# Altium PCB Arduino_DUE_V02b.PcbDoc (part 1 of 3)
Units mil, origin at the board's own origin, x right, y up, seen from the top; angles counter-clockwise.
Board outline 4416.66 x 2112 mil, 4 copper layers (Top Layer, Mid-Layer 1, Mid-Layer 2, Bottom Layer); 129 components, 175 nets, 644 pads, 366 vias.
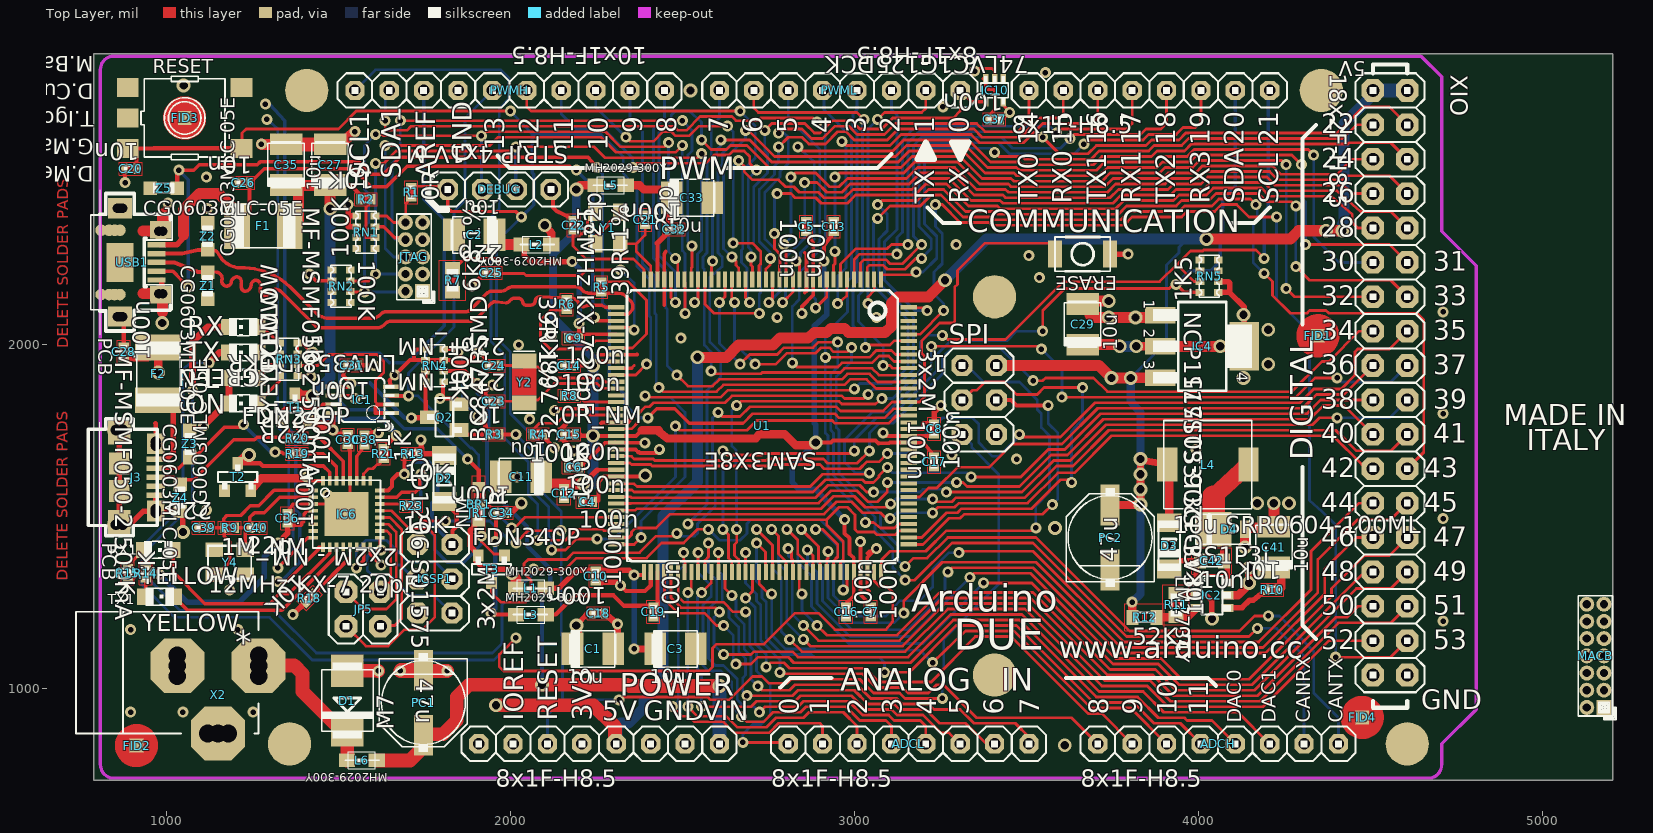
[diagram p0: Top Layer view]
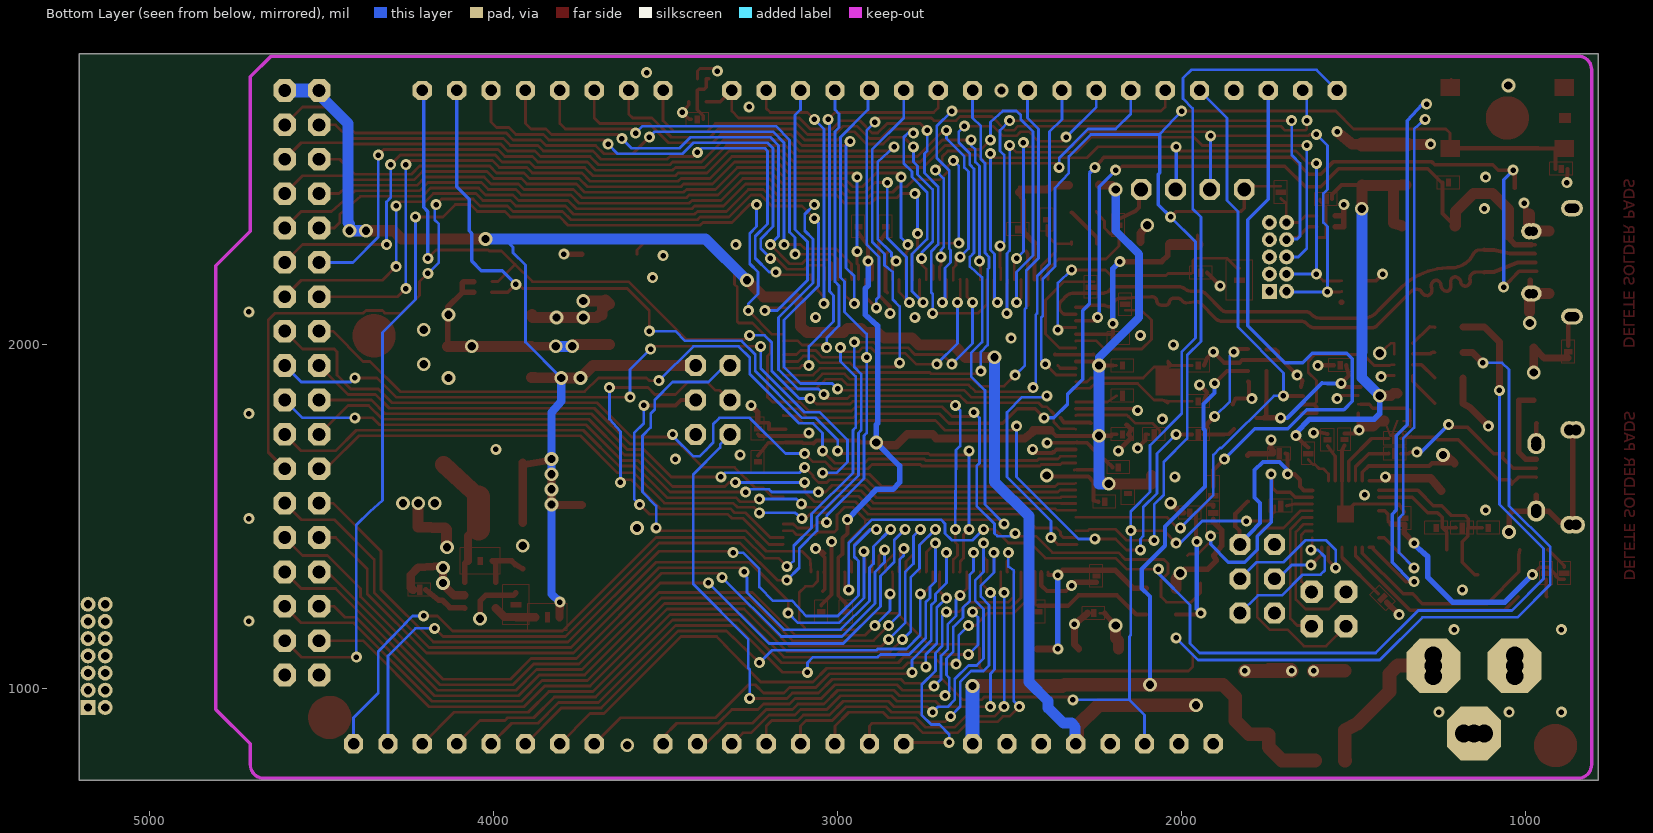
[diagram p1: Bottom Layer view, seen from below]
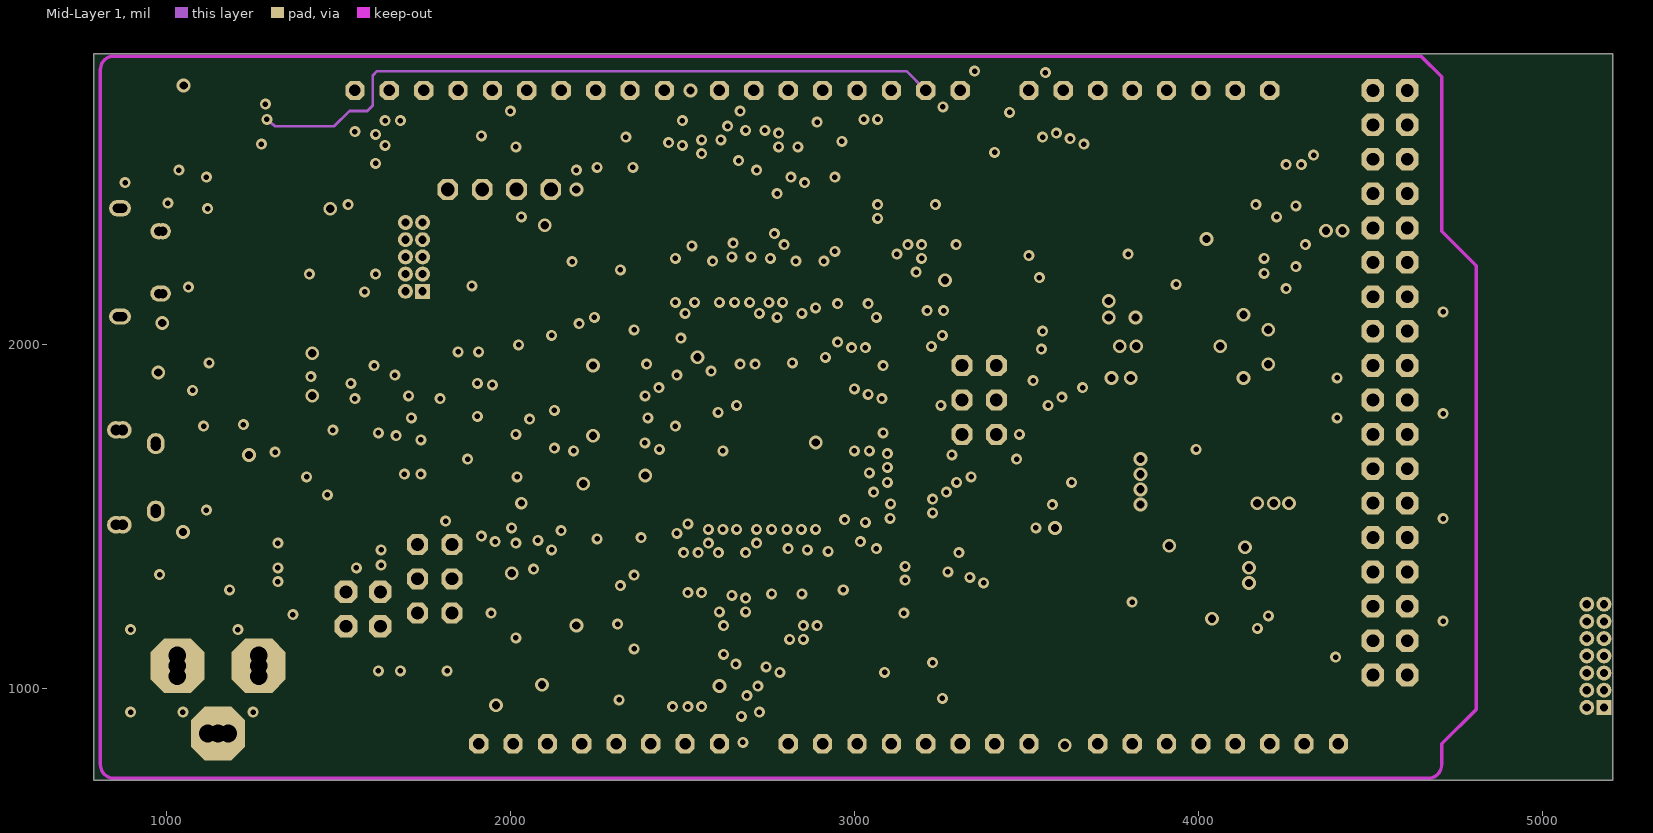
[diagram p2: Mid-Layer 1]
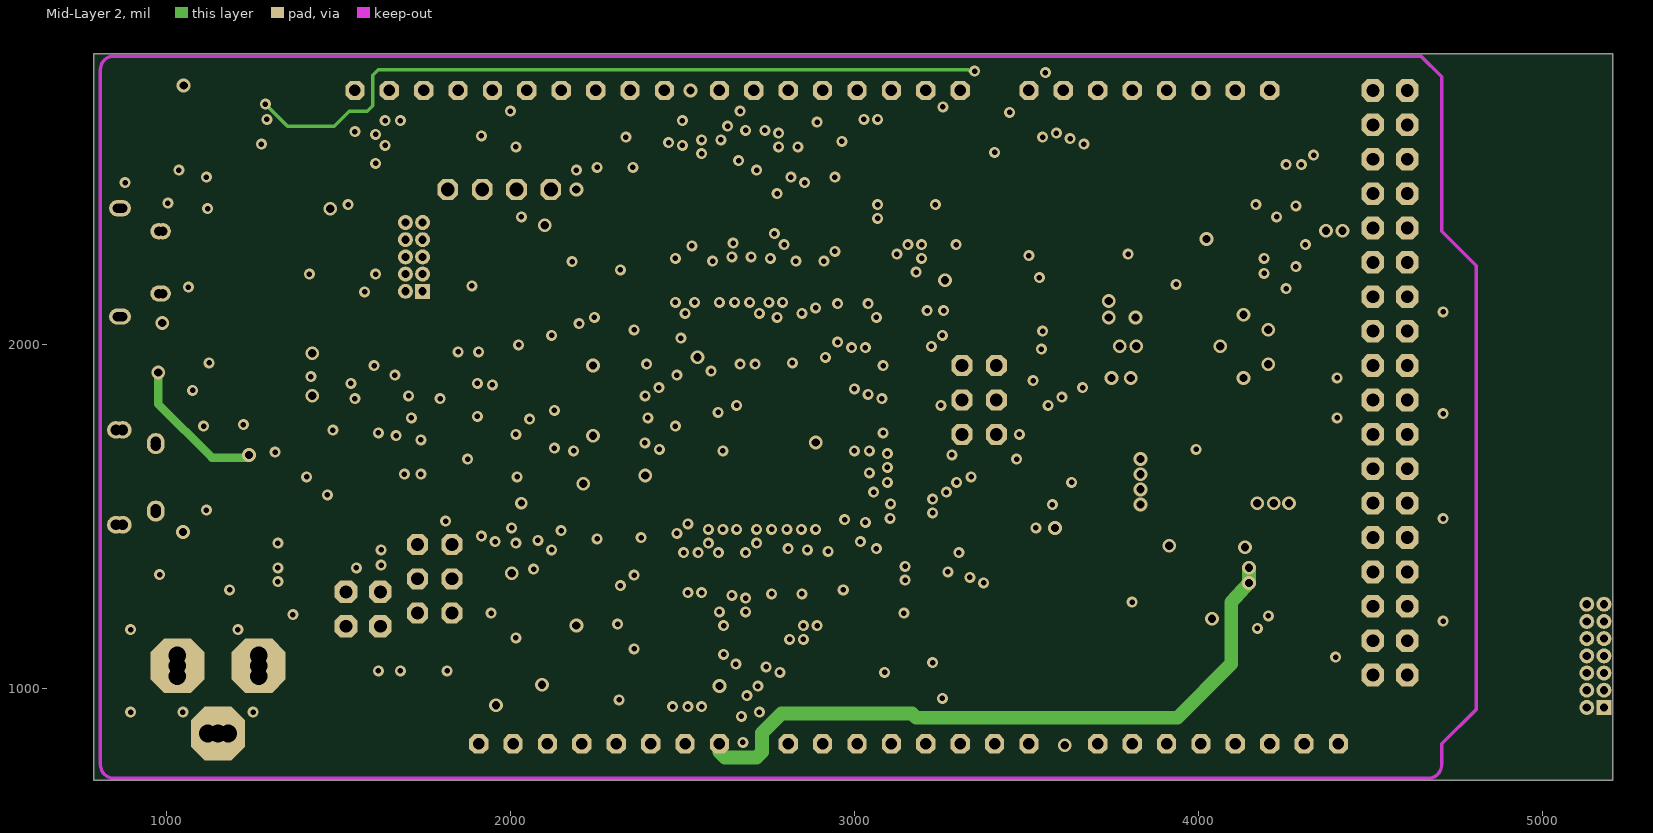
[diagram p3: Mid-Layer 2]

## Layer stack, top to bottom
Top Layer: signal copper 1.4
Dielectric: core 12.6, FR-4, Dk 4.8
Mid-Layer 1: signal copper 1.4
Dielectric: prepreg 12.6, FR-4, Dk 4.8
Mid-Layer 2: signal copper 1.4
Dielectric: core 12.6, FR-4, Dk 4.8
Bottom Layer: signal copper 1.4

## Board outline
789.13,733 5205.79,733 5205.79,2845 789.13,2845

## Design rules (kind name [scope] priority, off if disabled: settings)
AssemblyTestPointUsage [All] p1 off:
AssemblyTestpoint [All] p1 off: testpointundercomponent=TRUE minsize=40 maxsize=100 preferedsize=60 minholesize=0 maxholesize=40 preferedholesize=32 testpointgrid=1 usegrid=TRUE gridtolerance=0.01 allowsidetop=TRUE allowsidebottom=TRUE
Clearance [All] p1: gap=4
PolygonConnect [All] p1: connectstyle=Relief reliefconductorwidth=10 reliefentries=4 polygonreliefangle="90 Angle" airgapwidth=10
RoutingVias [All] p1: holewidth=28 width=50 viastyle="Through Hole" minholewidth=28 minwidth=50 maxholewidth=28 maxwidth=50
SolderMaskExpansion [All] p1: expansion=4
Width [All] p1: maxlimit=10 minlimit=10 preferedwidth=10
26 further rules are at their usual default settings.

## Components (designator, comment, footprint, x,y, rotation, side; value= is the part's Value field where it differs from the comment)
ADCH "8x1F-H8.5" 1X08 4057.98,839 r0 top
ADCL "8x1F-H8.5" 1X08 3157.98,839 r0 top
BR1 "NM" J0402 1907.98,1561 r270 top
C1 "10u" SMC_B 2239.98,1115 r0 top
C2 "10u" SMC_B 1894.98,2319 r180 top
C3 "10u" SMC_B 2479.98,1115 r0 top
C4 "100n" C0402 2223.98,1543 r0 top
C5 "100n" C0402 2859.98,2343 r270 top
C6 "100n" C0402 2183.98,1643 r0 top
C7 "100n" C0402 3047.98,1223 r90 top
C8 "100n" C0402 3231.98,1755 r270 top
C9 "100n" C0402 2183.98,2019 r0 top
C10 "100n" C0402 2247.98,1327 r90 top
C11 "10u" SMC_B 2030.98,1616 r180 top
C12 "100n" C0402 2155.98,1567 r90 top
C13 "100n" C0402 2939.98,2343 r270 top
C14 "100n" C0402 2171.98,1939 r0 top
C15 "100n" C0402 2171.98,1739 r0 top
C16 "100n" C0402 2975.98,1223 r90 top
C17 "100n" C0402 3231.98,1659 r90 top
C18 "100n" C0402 2255.98,1219 r180 top
C19 "100n" C0402 2415.98,1223 r90 top
C20 "10n" C0402 895.98,2511 r180 top
C21 "22p" C0402 2391.98,2363 r90 top
C22 "22p" C0402 2183.98,2347 r90 top
C23 "22pF_NM" C0402 1951.98,1835 r180 top
C24 "22pF_NM" C0402 1951.98,1939 r180 top
C25 "22p" C0402 1943.98,2209 r180 top
C26 "10n" C0402 1223.98,2471 r180 top
C27 "10u" SMC_B 1475.98,2523 r90 top
C28 "100n" C0402 875.98,1979 r90 top
C29 "10u" SMC_B 3663.98,2059 r90 top
C30 "100n" C0402 1526.98,1724 r90 top
C31 "100n" C0402 1538.98,1940 r180 top
C32 "100n" C0402 2475.98,2335 r180 top
C33 "10u" SMC_B 2527.98,2427 r0 top
C34 "100n" C0402 1975.98,1511 r180 top
C35 "10u" SMC_B 1347.98,2523 r90 top
C36 "100n" C0402 1351.98,1495 r90 top
C37 "100n" C0402 3407.98,2655 r180 top
C38 "1u" C0402 1575.98,1723 r90 top
C39 "22p" C0402 1107.98,1467 r180 top
C40 "22p" C0402 1259.98,1467 r0 top
C41 "10u" SMC_B 4219.98,1411 r90 top
C42 "10n" C0603-ROUND 4039.98,1371 r0 top
COMMUNICATION "8x1F-H8.5" 1X08 3857.98,2739 r0 top
D1 "M7" SMB 1525.98,965 r90 top
D2 "CD1206-S01575" MINIMELF 1807.98,1611 r270 top
D3 "CD1206-S01575" MINIMELF 3915.98,1415 r90 top
D4 "SS1P3L" DO220AAL 4071.98,1463 r0 top
DEBUG "STRIP 4x1V M" 1X04 1967.98,2451 r180 top
ERASE "" SMD_157SW 3663.98,2263 r180 top
F1 "MF-MSMF050-2 500mA" L1812 1281.98,2345 r180 top
F2 "MF-MSMF050-2 500mA" L1812 975.98,1915 r270 top
FID1 "*" FIDUCIA-MOUNT 4347.98,2025.63 r0 top
FID2 "*" FIDUCIA-MOUNT 912.98,834 r0 top
FID3 "*" FIDUCIA-MOUNT 1052.98,2659 r0 top
FID4 "*" FIDUCIA-MOUNT 4476.98,916 r0 top
IC1 "LMV358IDGKR" MSOP08 1569.98,1839 r90 top
IC2 "LM2734Y" SOT23-6 4039.98,1271 r270 top
IC4 "NCP1117ST33T3G -3V3" SOT223 4011.98,1995 r270 top
IC6 "ATMEGA16U2-MU" MLF32 1523.98,1507 r0 top
IC10 "74LVC1G125DCK" SC70-5 3407.98,2739 r180 top
ICSP1 "3x2M" 2X03 1779.98,1319 r90 top
J3 "USB-MICRO B" CON2_USB_MICRO_B_AT 862.98,1614 r270 top
JP5 "2x2M - NM" 2X02 1571.98,1231 r180 top
JR1 "0R" R0402 1907.98,1511 r90 top
JTAG "*" PINHEAD_2X05_127 1719.98,2255 r180 top
L "YELLOW" CHIP-LED0805 1222.98,1903 r90 top
L1 "MH2029-300Y" 0805 2059.98,1291 r0 top
L2 "MH2029-300Y" 0805 2075.98,2291 r180 top
L3 "MH2029-300Y" 0805 2059.98,1215 r0 top
L4 "10u SRR0604-100ML" SRR0604 4027.98,1651 r0 top
L5 "MH2029-300Y" 0805 2291.98,2463 r0 top
L6 "MH2029-300Y" 0805 1567.98,791 r180 top
MACB "Eth" PINHEAD_2X07_127 5154.98,1095 r180 top
ON "GREEN" CHIP-LED0805 1222.98,1829 r90 top
PC1 "47u" PANASONIC_D 1746.98,959 r270 top
PC2 "47u" PANASONIC_D 3743.98,1439 r90 top
POWER "8x1F-H8.5" 1X08 2257.98,839 r0 top
PWMH "10x1F-H8.5" 1X10 1997.98,2739 r180 top
PWML "8x1F-H8.5" 1X08 2957.98,2739 r180 top
Q2 "BC847BSMD" SOT23 1807.98,1789 r90 top
R1 "0R" R0402 1711.98,2443 r90 top
R2 "10K" R0402 1579.98,2423 r180 top
R3 "1K" R0402 1951.98,1739 r180 top
R4 "100K" R0402 2079.98,1739 r0 top
R5 "39R 1%" R0402 2263.98,2167 r90 top
R6 "39R 1%" R0402 2163.98,2117 r270 top
R7 "6k8 1%" R0603-ROUND 1831.98,2187 r90 top
R8 "0R_NM" R0402 2171.98,1851 r0 top
R9 "1M_NM" R0402 1183.98,1467 r0 top
R10 "10k" R0402 4215.98,1287 r180 top
R11 "10K" R0603-ROUND 3935.98,1243 r90 top
R12 "52K3" R0603-ROUND 3843.98,1207 r0 top
R13 "10K" R0402 1715.98,1683 r0 top
R14 "1K" R0402 939.98,1335 r270 top
R15 "1K" R0402 887.98,1335 r90 top
R18 "10K" R0402 1415.98,1263 r225 top
R19 "22R" R0402 1379.98,1683 r180 top
R20 "22R" R0402 1379.98,1727 r180 top
R21 "1K" R0402 1631.98,1683 r90 top
R23 "10K" R0402 1711.98,1531 r0 top
RESET "TS42" TS42 1052.98,2659 r0 top
RN1 "100K" CAT16 1579.98,2327 r90 top
RN2 "100K" CAT16 1507.98,2170 r270 top
RN3 "1k" CAY16 1354.98,1957 r270 top
RN4 "100K" CAT16 1779.98,1939 r270 top
RN5 "1K5" CAT16 4031.98,2199 r90 top
RX "YELLOW" CHIP-LED0805 1222.98,2051 r90 top
RX1 "YELLOW" CHIP-LED0805 975.98,1403 r270 top
SPI "3x2M" 2X03 3362.98,1839 r270 top
T1 "FDN340P" SOT-23 1373.98,1818 r180 top
T2 "FDN340P" SOT-23 1207.98,1615 r180 top
T3 "FDN340P" SOT-23 1943.98,1347 r0 top
TX "YELLOW" CHIP-LED0805 1222.98,1977 r90 top
TX1 "YELLOW" CHIP-LED0805 979.98,1267 r270 top
U1 "SAM3X8E" LQFP144 2732.98,1764 r180 top
USB1 "MICRO-USB-AB1" MCR-AB1-S-RA-SMT 864.98,2239 r270 top
X2 "*" POWERSUPPLY_DC-21MM 1017.98,1069 r90 top
XIO "18x2F-H8.5" 2X18 4557.98,1889 r270 top
Y1 "12MHz KX-7 20pF" CRYSTAL-3.2-2.5 2282.98,2339 r270 top
Y2 "32.768Khz" RESONATOR_EPSON_FC_145 2039.98,1891 r90 top
Y4 "12MHz KX-7 20pF" CRYSTAL-3.2-2.5 1183.98,1367 r0 top
Z1 "CG0603MLC-05E" CT/CN0603 1119.98,2171 r270 top
Z2 "CG0603MLC-05E" CT/CN0603 1119.98,2315 r90 top
Z3 "CG0603MLC-05E" CT/CN0603 1067.98,1711 r270 top
Z4 "CG0603MLC-05E" CT/CN0603 1039.98,1555 r90 top
Z5 "CG0603MLC-05E" CT/CN0603 991.98,2455 r0 top

## Footprints (in the part's own frame and the unit in brackets; to place one, negate y for a bottom-side part, rotate by r counter-clockwise, add the part's x,y. Pads: shape width x height; smd on the part's side, far side on the other; paste and mask are expansions set on the pad)
1X04 [mil]
  oct 60x60 hole 40: 1(-150,0) 2(-50,0) 3(50,0) 4(150,0)
  silkscreen extent -200,-50 200,50
1X08 [mil]
  oct 56x56 hole 33.46: 1(-350,0) 2(-250,0) 3(-150,0) 4(-50,0) 5(50,0) 6(150,0) 7(250,0) 8(350,0)
  silkscreen extent -400,-50 400,50
1X10 [mil]
  oct 56x56 hole 33.46: 1(-450,0) 2(-350,0) 3(-250,0) 4(-150,0) 5(-50,0) 6(50,0) 7(150,0) 8(250,0) 9(350,0) 10(450,0)
  silkscreen extent -500,-50 500,50
2X02 [mil]
  oct 66x66 hole 37.4: 1(-50,-50) 2(-50,50) 3(50,-50) 4(50,50)
  silkscreen extent -100,-100 100,100
2X03 [mm]
  oct 1.55x1.55 hole 0.95: 1(-2.54,-1.27) 2(-2.54,1.27) 3(0,-1.27) 4(0,1.27) 5(2.54,-1.27) 6(2.54,1.27)
  silkscreen extent -3.81,-2.54 3.81,2.54
2X18 [mil]
  oct 66x66 hole 37.4: 1(-850,-50) 2(-850,50) 3(-750,-50) 4(-750,50) 5(-650,-50) 6(-650,50) 7(-550,-50) 8(-550,50) 9(-450,-50) 10(-450,50) 11(-350,-50) 12(-350,50) 13(-250,-50) 14(-250,50) 15(-150,-50) 16(-150,50) 17(-50,-50) 18(-50,50) 19(50,-50) 20(50,50) 21(150,-50) 22(150,50) 23(250,-50) 24(250,50) 25(350,-50) 26(350,50) 27(450,-50) 28(450,50) 29(550,-50) 30(550,50) 31(650,-50) 32(650,50) 33(750,-50) 34(750,50) 35(850,-50) 36(850,50)
  silkscreen extent -900,-100 900,100
0805 [mm]
  rect 1.2x1 smd: 1(-1.1,0) 2(1.1,0)
  silkscreen extent -1.3,-0.63 1.2,0.63
C0402 [mil]
  rect 20x30 smd: 1(-17.5,0) 2(17.5,0)
  Top Layer region: -7.87,-11.81 7.87,-11.81 7.87,11.81 -7.87,11.81
  Top Layer lines w2: -32.99,-19.02 -32.99,19.02 32.99,19.02 32.99,-19.02 -32.99,-19.02
  silkscreen extent -20,-10 20,10
C0603-ROUND [mil]
  rect 35.37x43.31 smd: 1(-35,0) 2(35,0)
  Top Layer region: -7.87,-11.81 7.87,-11.81 7.87,11.81 -7.87,11.81
  Top Layer lines w2: -57.99,-38.7 -57.99,38.7 57.99,38.7 57.99,-38.7 -57.99,-38.7
  silkscreen extent -33,-18 33,19
CAT16 [mm]
  rect 0.5x0.65 smd: 1(-1.2,-0.675) 2(-0.4,-0.675) 3(0.4,-0.675) 4(1.2,-0.675) 5(1.2,0.675) 6(0.4,0.675) 7(-0.4,0.675) 8(-1.2,0.675)
  silkscreen extent -1.55,-0.75 1.55,0.75
CAY16 [mm]
  rect 0.5x0.65 smd: 1(-1.2,-0.675) 2(-0.4,-0.675) 3(0.4,-0.675) 4(1.2,-0.675) 5(1.2,0.675) 6(0.4,0.675) 7(-0.4,0.675) 8(-1.2,0.675)
  silkscreen extent -1.55,-0.75 1.55,0.75
CHIP-LED0805 [mm]
  rect 1.2x1.2 smd: A(0,-1.05) C(0,1.05)
  silkscreen extent -0.68,-1.05 0.68,1.05
CON2_USB_MICRO_B_AT [mil]
  rect 16x53 smd: P1(-52,106) P2(-26,106) P3(0,106) P4(26,106) P5(52,106)
  round 51.5 hole 31.5: P$1(-103,106) P$2(-93,106) P$3(-138,-10) P$4(-138,10) P$5(138,10) P$6(138,-10) P$7(93,106) P$8(103,106)
  rect 70x65 smd: S1(-130,0) S2(130,0)
  rect 60x50 smd: S3(-98,106) S4(98,106)
  rect 64x60 smd: S5(-40,0) S6(40,0)
  silkscreen extent -170,-90 290,110
CRYSTAL-3.2-2.5 [mm]
  rect 1.3x1.05 smd: 1(-1.15,-0.925) 2(1.15,-0.925) 3(1.15,0.925) 4(-1.15,0.925)
  silkscreen extent -1.6,-1.25 1.6,1.25
CT/CN0603 [mm]
  rect 1x1 smd: 1(-1,0) 2(1,0)
  silkscreen extent -0.75,-0.35 0.75,0.35
DO220AAL [mil]
  rect 105x100 smd: P$1(-27.56,0)
  rect 30x50 smd: P$2(64.96,0)
  silkscreen extent -79,-43 79,43
FIDUCIA-MOUNT [mil]
  rect 40x40 smd: P$1(0,0)
  Top Layer circle w5: c0,0 r59.06
  Top Layer circle w86: c0,0 r19.68
J0402 [mm]
  rect 0.7x0.9 smd: 1(-0.65,0) 2(0.65,0) 3(1.95,0)
  Top Layer region: 1.1,-0.4 1.5,-0.4 1.5,0.4 1.1,0.4
  Top Layer region: -0.2,-0.4 0.2,-0.4 0.2,0.4 -0.2,0.4
  Top Layer lines w0.051: 2.773,-0.483 -1.473,-0.483 -1.473,0.483 2.773,0.483 2.773,-0.483
  silkscreen extent 0.72,-0.3 1.83,0.29
L1812 [mm]
  rect 1.9x3.4 smd: 1(-1.95,0) 2(1.95,0)
  silkscreen extent -2.39,-1.65 2.4,1.65
LQFP144 [mm]
  rect 0.3x1.2 smd: 1(-8.75,-10.8) 2(-8.25,-10.8) 3(-7.75,-10.8) 4(-7.25,-10.8) 5(-6.75,-10.8) 6(-6.25,-10.8) 7(-5.75,-10.8) 8(-5.25,-10.8) 9(-4.75,-10.8) 10(-4.25,-10.8) 11(-3.75,-10.8) 12(-3.25,-10.8) 13(-2.75,-10.8) 14(-2.25,-10.8) 15(-1.75,-10.8) 16(-1.25,-10.8) 17(-0.75,-10.8) 18(-0.25,-10.8) 19(0.25,-10.8) 20(0.75,-10.8) 21(1.25,-10.8) 22(1.75,-10.8) 23(2.25,-10.8) 24(2.75,-10.8) 25(3.25,-10.8) 26(3.75,-10.8) 27(4.25,-10.8) 28(4.75,-10.8) 29(5.25,-10.8) 30(5.75,-10.8) 31(6.25,-10.8) 32(6.75,-10.8) 33(7.25,-10.8) 34(7.75,-10.8) 35(8.25,-10.8) 36(8.75,-10.8) 73(8.75,10.8) 74(8.25,10.8) 75(7.75,10.8) 76(7.25,10.8) 77(6.75,10.8) 78(6.25,10.8) 79(5.75,10.8) 80(5.25,10.8) 81(4.75,10.8) 82(4.25,10.8) 83(3.75,10.8) 84(3.25,10.8) 85(2.75,10.8) 86(2.25,10.8) 87(1.75,10.8) 88(1.25,10.8) 89(0.75,10.8) 90(0.25,10.8) 91(-0.25,10.8) 92(-0.75,10.8) 93(-1.25,10.8) 94(-1.75,10.8) 95(-2.25,10.8) 96(-2.75,10.8) 97(-3.25,10.8) 98(-3.75,10.8) 99(-4.25,10.8) 100(-4.75,10.8) 101(-5.25,10.8) 102(-5.75,10.8) 103(-6.25,10.8) 104(-6.75,10.8) 105(-7.25,10.8) 106(-7.75,10.8) 107(-8.25,10.8) 108(-8.75,10.8)
  rect 1.2x0.3 smd: 37(10.8,-8.75) 38(10.8,-8.25) 39(10.8,-7.75) 40(10.8,-7.25) 41(10.8,-6.75) 42(10.8,-6.25) 43(10.8,-5.75) 44(10.8,-5.25) 45(10.8,-4.75) 46(10.8,-4.25) 47(10.8,-3.75) 48(10.8,-3.25) 49(10.8,-2.75) 50(10.8,-2.25) 51(10.8,-1.75) 52(10.8,-1.25) 53(10.8,-0.75) 54(10.8,-0.25) 55(10.8,0.25) 56(10.8,0.75) 57(10.8,1.25) 58(10.8,1.75) 59(10.8,2.25) 60(10.8,2.75) 61(10.8,3.25) 62(10.8,3.75) 63(10.8,4.25) 64(10.8,4.75) 65(10.8,5.25) 66(10.8,5.75) 67(10.8,6.25) 68(10.8,6.75) 69(10.8,7.25) 70(10.8,7.75) 71(10.8,8.25) 72(10.8,8.75) 109(-10.8,8.75) 110(-10.8,8.25) 111(-10.8,7.75) 112(-10.8,7.25) 113(-10.8,6.75) 114(-10.8,6.25) 115(-10.8,5.75) 116(-10.8,5.25) 117(-10.8,4.75) 118(-10.8,4.25) 119(-10.8,3.75) 120(-10.8,3.25) 121(-10.8,2.75) 122(-10.8,2.25) 123(-10.8,1.75) 124(-10.8,1.25) 125(-10.8,0.75) 126(-10.8,0.25) 127(-10.8,-0.25) 128(-10.8,-0.75) 129(-10.8,-1.25) 130(-10.8,-1.75) 131(-10.8,-2.25) 132(-10.8,-2.75) 133(-10.8,-3.25) 134(-10.8,-3.75) 135(-10.8,-4.25) 136(-10.8,-4.75) 137(-10.8,-5.25) 138(-10.8,-5.75) 139(-10.8,-6.25) 140(-10.8,-6.75) 141(-10.8,-7.25) 142(-10.8,-7.75) 143(-10.8,-8.25) 144(-10.8,-8.75)
  silkscreen extent -10,-10 10,10
MCR-AB1-S-RA-SMT [mm]
  rect 0.4x1.35 smd: 1(-1.3,2.7) 2(-0.65,2.7) 3(0,2.7) 4(0.65,2.7) 5(1.3,2.7)
  round 1.208 hole 0.7: P$1(-4,0.2) P$3(-4,0) P$4(-4,-0.2) P$5(4,0.2) P$6(4,0) P$7(4,-0.2) P$8(-2.3,3.15) P$9(-2.3,2.85) P$10(2.3,3.15) P$11(2.3,2.85)
  rect 2.9x2 smd: P$2(0,0)
  rect 1.3x1.6 smd: S1(-2.4,3) S2(2.4,3)
  rect 1.5x1.8 smd: S3(-4,0) S4(4,0)
  round 0.85 smd: ""(-2.375,-0.8) ""(-2.375,-0.4) ""(-2.375,0) ""(-2.375,-1.4) ""(2.375,-0.8) ""(2.375,-0.4) ""(2.375,0) ""(2.375,-1.4)
  Top Layer lines w0.075: -3.8,-0.525 -3.8,0.525
  silkscreen extent -5.35,-2.15 5.35,3.85
MINIMELF [mm]
  rect 1.4x1.8 smd: A(1.7,0) C(-1.7,0)
  silkscreen extent -1.85,-0.86 1.85,0.86
MLF32 [mm]
  rect 0.7x0.28 smd: 1(-2.45,1.75) 2(-2.45,1.25) 3(-2.45,0.75) 4(-2.45,0.25) 5(-2.45,-0.25) 6(-2.45,-0.75) 7(-2.45,-1.25) 8(-2.45,-1.75) 17(2.45,-1.75) 18(2.45,-1.25) 19(2.45,-0.75) 20(2.45,-0.25) 21(2.45,0.25) 22(2.45,0.75) 23(2.45,1.25) 24(2.45,1.75)
  rect 0.28x0.7 smd: 9(-1.75,-2.45) 10(-1.25,-2.45) 11(-0.75,-2.45) 12(-0.25,-2.45) 13(0.25,-2.45) 14(0.75,-2.45) 15(1.25,-2.45) 16(1.75,-2.45) 25(1.75,2.45) 26(1.25,2.45) 27(0.75,2.45) 28(0.25,2.45) 29(-0.25,2.45) 30(-0.75,2.45) 31(-1.25,2.45) 32(-1.75,2.45)
  rect 3.254x3.254 smd: 33(0,0)
  Top Layer region: -0.635,-0.635 0.635,-0.635 0.635,0.635 -0.635,0.635
  silkscreen extent -2.5,-2.5 2.5,2.5
MSOP08 [mm]
  rect 0.3x1.2 smd: 1(-0.976,-2.113) 2(-0.326,-2.113) 3(0.324,-2.113) 4(0.974,-2.113) 5(0.974,2.112) 6(0.324,2.112) 7(-0.326,2.112) 8(-0.976,2.112)
  silkscreen extent -1.63,-2.36 1.62,2.36
PANASONIC_D [mm]
  rect 3x1.4 smd: +(2.4,0) -(-2.4,0)
  silkscreen extent -3.65,-3.25 3.65,3.25
PINHEAD_2X05_127 [mm]
  rect 1.108x1.108 hole 0.6: 1(-0.635,2.54)
  round 1.108 hole 0.6: 2(0.635,2.54) 3(-0.635,1.27) 4(0.635,1.27) 5(-0.635,0) 6(0.635,0) 7(-0.635,-1.27) 8(0.635,-1.27) 9(-0.635,-2.54) 10(0.635,-2.54)
  silkscreen extent -1.52,-3.17 1.27,3.43
PINHEAD_2X07_127 [mm]
  rect 1.108x1.108 hole 0.6: 1(-0.635,3.81)
  round 1.108 hole 0.6: 2(0.635,3.81) 3(-0.635,2.54) 4(0.635,2.54) 5(-0.635,1.27) 6(0.635,1.27) 7(-0.635,0) 8(0.635,0) 9(-0.635,-1.27) 10(0.635,-1.27) 11(-0.635,-2.54) 12(0.635,-2.54) 13(-0.635,-3.81) 14(0.635,-3.81)
  silkscreen extent -1.52,-4.44 1.27,4.7
POWERSUPPLY_DC-21MM [mm]
  oct 4x4 hole 1.3: 1(-5.08,-3.353) 2(-0.076,-6.35) 3(-0.076,-0.356)
  round 1.95 hole 1.3: 4(-5.08,-4.115) 5(-5.08,-2.591) 6(-0.838,-0.356) 7(0.686,-0.356) 8(-0.838,-6.35) 9(0.686,-6.35)
  silkscreen extent -5.08,-6.35 3.91,7.14
R0402 [mil]
  rect 20x30 smd: 1(-17.5,0) 2(17.5,0)
  Top Layer region: -7.87,-15.75 7.87,-15.75 7.87,15.75 -7.87,15.75
  Top Layer lines w2: -32.99,19.02 -32.99,-19.02 32.99,-19.02 32.99,19.02 -32.99,19.02
  silkscreen extent -20,-10 20,10
R0603-ROUND [mil]
  rect 35.37x43.31 smd: 1(-35,0) 2(35,0)
  Top Layer region: -7.87,-15.75 7.87,-15.75 7.87,15.75 -7.87,15.75
  Top Layer lines w2: -57.99,38.7 -57.99,-38.7 57.99,-38.7 57.99,38.7 -57.99,38.7
  silkscreen extent -33,-17 33,17
RESONATOR_EPSON_FC_145 [mm]
  rect 1.1x1.8 smd: P$1(-1.55,0) P$2(1.55,0)
  Top Layer region: -1,-0.9 1,-0.9 1,0.9 -1,0.9
  Top Layer region: -1,-0.9 1,-0.9 1,0.9 -1,0.9
  Top Layer region: -1,-0.9 1,-0.9 1,0.9 -1,0.9
  silkscreen extent -2.29,-0.76 2.29,0.76
SC70-5 [mm]
  rect 0.4x0.7 smd: 1(-0.65,-0.85) 2(0,-0.85) 3(0.65,-0.85) 4(0.65,0.85) 5(-0.65,0.85)
  silkscreen extent -1,-1.05 1,1.05
SMB [mm]
  rect 2.4x2.4 smd: A(2.2,0) C(-2.2,0)
  silkscreen extent -2.79,-1.91 2.79,1.91
SMC_B [mm]
  rect 1.6x2.4 smd: +(-1.5,0) -(1.5,0)
  silkscreen extent -1.75,-1.35 1.75,1.35
SMD_157SW [mil]
  rect 40x78 smd: 1(-80,0) 2(80,0)
  silkscreen extent -80,-50 80,50
SOT23 [mm]
  rect 1x1.4 smd: 1(-0.95,-1.1) 2(0.95,-1.1) 3(0,1.1)
  silkscreen extent -1.42,-1.3 1.42,1.3
SOT23-6 [mm]
  rect 0.6x0.9 smd: 1(-0.95,-1.15) 2(0,-1.15) 3(0.95,-1.15) 4(0.95,1.15) 5(0,1.15) 6(-0.95,1.15)
  silkscreen extent -1.42,-1.4 1.42,1.4
SOT223 [mil]
  rect 48x88 smd: 1(-91,-122) 2(0,-122) 3(91,-122)
  rect 141.73x86.61 smd: 4(0,122.01)
  silkscreen extent -129,-144 129,144
SOT-23 [mil]
  rect 31x35 smd: 1(1,-40) 2(-37,40) 3(39,40)
  silkscreen extent -56,-37 58,37
SRR0604 [mm]
  rect 1.5x2.5 smd: P$1(3,0) P$2(-3,0)
  silkscreen extent -3.25,-3.25 3.25,3.25
TS42 [mm]
  rect 1.6x1.4 smd: 1(-4.2,2.25) 2(4.2,2.25) 3(-4.2,-2.25) 4(4.2,-2.25) 5(-4.2,0)
  Top Layer region: 3.48,1.626 4.928,1.626 4.928,2.87 3.48,2.87
  Top Layer region: 3.48,-2.87 4.928,-2.87 4.928,-1.626 3.48,-1.626
  Top Layer region: -4.928,-2.87 -3.48,-2.87 -3.48,-1.626 -4.928,-1.626
  Top Layer region: -4.928,1.626 -3.48,1.626 -3.48,2.87 -4.928,2.87
  Top Layer region: -4.699,-0.381 -3.81,-0.381 -3.81,0.381 -4.699,0.381
  silkscreen extent -3.23,-3.09 2.98,3.09

## Part data
ADCH ADCL COMMUNICATION POWER PWML: library part PINHD-1X8
BR1: library part J0402
C1 C2 C3 C11 C27 C29 C33 C35 C41: library part CPOL-EUSMCB
C4 C5 C6 C7 C8 C9 C10 C12 C13 C14 C15 C16 C17 C18 C19 C20 C21 C22 C23 C24 C25 C26 C28 C30 C31 C32 C34 C36 C37 C38 C39 C40: library part C-EUC0402
C42: library part C-EUC0603
D1: library part DIODE-SMB
D2 D3: library part DIODE-MINIMELF
DEBUG: library part PINHD-1X4
ERASE: library part MYSMD_PB157
F1 F2: library part L-EUL1812
FID1 FID2 FID3 FID4: library part FIDUCIALMOUNT
IC1: library part LMV358MMX
IC2: library part LM2736Y
IC4: library part MC33269ST-3.3T3
ICSP1 SPI: library part PINHD-2X3
J3: library part MYCON2_USB-MINI-B
JP5: library part PINHD-2X2
JR1 R1 R2 R3 R4 R5 R6 R8 R9 R10 R13 R14 R15 R18 R19 R20 R21 R23: library part R-EU_R0402
JTAG: library part PINHEAD_PINHD-2X5PASSO127
L ON RX RX1 TX TX1: library part LEDCHIP-LED0805
L1 L2 L3 L5 L6: library part WE-CBF_0805
L4: library part L-USSRR0604
MACB: library part PINHEAD_PINHD-2X7PASSO127
PC1 PC2: library part CPOL-EUD
PWMH: library part PINHD-1X10
R7: library part R-EU_R0603
R11 R12: library part R-EU_0603-RND
RN1 RN2 RN4 RN5: library part 4R-NCAT16
RN3: library part 4R-NCAY16
T1 T2 T3: library part PMOSSOT23
U1: library part ATSAM3X/AAU
USB1: library part MICRO_USB
X2: library part POWERSUPPLY_DC21MMX
XIO: library part PINHD-2X18
Y1 Y4: library part CRYSTAL-3.2-2.5
Y2: library part RESONATOR_EPSON_FC_145
Z1 Z2 Z3 Z4 Z5: library part VARISTORCN0603

## Free pads (board coordinates)
  round 125.98 smd: ""(1357.98,839) ""(1407.98,2739) ""(3407.98,1039) ""(3407.98,2139) ""(4357.98,2739) ""(4607.98,839)

## Via types
v1: diameter 32, hole 16, Top Layer to Bottom Layer, 313 vias
v2: diameter 40, hole 24, Top Layer to Bottom Layer, 52 vias
v3: diameter 36, hole 20, Top Layer to Bottom Layer, 1 vias

## Nets (pads, with @x,y where several pads share a name; then routed paths per layer and width w, separated by ;. In a path a pad name is that pad's centre, name@x,y a point inside that pad or via, vN(x,y) a via of type N, cw(c..) or ccw(c..) an arc to the next point about the centre after c; other vN are vias at no path point)
8PB4: IC6.18 JP5.1 | length 214.4
  Top Layer w8: IC6.18@1620.44,1457.79 1641.19,1457.79 1651.98,1447 1651.98,1311 JP5.1@1621.98,1281
8PB5: IC6.19 JP5.3 | length 431.2
  Top Layer w8: JP5.3@1521.98,1281 1571.98,1231 1639.98,1231 1667.98,1259 1667.98,1455 1645.51,1477.47 IC6.19@1620.44,1477.47
8PB6: IC6.20 JP5.2 | length 408.8
  Top Layer w8: IC6.20@1620.44,1497.16 1649.82,1497.16 1683.98,1463 1683.98,1203 1663.98,1183 1623.98,1183 JP5.2@1621.98,1181
8PB7: IC6.21 JP5.4 | length 745.3
  Top Layer w8: JP5.4@1521.98,1181 1579.98,1123 1643.98,1123 1691.98,1171 1743.98,1171 1779.98,1207 1779.98,1447 1759.98,1467 1703.98,1467 1654.14,1516.84 IC6.21@1620.44,1516.84
16U2-TX: IC6.9 IC10.2 | length 3938
  Top Layer w8: v1(3349.98,2795) 3357.98,2803 3399.98,2803 3407.98,2795 IC10.2@3407.98,2772.46
  Top Layer w10: v1(1323.98,1311) 1347.98,1311 1443.52,1406.54 1443.52,1410.54 IC6.9@1455.08,1410.54
  Mid-Layer 2 w10: v1(1287.98,2699) 1351.98,2635 1487.98,2635 1531.98,2679 1583.98,2679 1599.98,2695 1599.98,2783 1615.98,2799 3331.98,2799 3335.98,2795 v1(3349.98,2795)
  Bottom Layer w10: v1(1287.98,2699) 1299.98,2699 1343.98,2651 1343.98,1767 1375.98,1735 1375.98,1519 1387.98,1507 1387.98,1367 1331.98,1311 v1(1323.98,1311)
+3V3: BR1.3 C1.+ C4.2 C5.2 C6.2 C7.2 C8.2 C18.2 C20.2 C29.+ C37.1 ERASE.1 IC1.6 IC4.2 IC4.4 IC10.5 JR1.1 JTAG.1 L1.1 L2.1 POWER.2 POWER.4 R4.2 RN1.5 RN1.6 RN2.2 RN2.3 RN3.5 RN3.7 RN3.8 RN5.1 RN5.2 T3.2 U1.11 U1.52 U1.57 U1.62 U1.105 U1.125 | length 3123.1
  Top Layer w0.31: RN5.2@4058.55,2183.25 RN5.2@4058.81,2183
  Top Layer w8: RN3.5@1381.55,1909.76 1418.74,1909.76 v1(1419.98,1907) ; RN3.7@1381.55,1972.75 RN3.8@1381.55,2004.24 1390.74,2004.24 v2(1423.98,1975) ; RN2.2@1480.66,2185 RN2.2@1481.41,2185.75 ; IC1.6@1486.83,1851.76 1539.22,1851.76 v1(1547.98,1843) ; R4.2@2095.98,1738.5 R4.2@2097.48,1739 ; R4.2@2104.98,1739 2099.98,1740 R4.2@2095.98,1739 ; L2.1@2119.29,2291 2121.29,2292.31 L2.1@2119.98,2299 ; C1.+@2180.92,1115 C1.+@2183.98,1115 ; 2223.98,1219 C18.2@2238.48,1219 ; U1.57@2303.98,1715 U1.57@2307.78,1714.79 U1.57@2311.48,1714.5 ; U1.62@2304.48,1616.5 2306.15,1616 U1.62@2307.78,1616.36 ; v2@2389.34,1616.36 v2(2391.98,1619) ; U1.11@2880.48,2191 U1.11@2880.62,2189.2 ; C8.2@3231.98,1737.5 C8.2@3231.98,1739 ; R4.2@2095.98,1739 cw(c2096.73,1737.7) R4.2@2097.48,1739 ; R4.2@2095.98,1739 R4.2@2097.48,1739
  Top Layer w10: v1(1415.98,2205) 1435.98,2185 RN2.2@1479.98,2185 ; RN2.2@1480.66,2185 RN2.2@1479.98,2185 ; RN2.3@1481.41,2154.25 1478.73,2154.25 1479.98,2161 RN2.2@1479.98,2185 ; C37.1@3425.48,2655 3431.98,2655 v1(3451.98,2675) 3433.57,2696.59 IC10.5@3433.57,2705.54
  Top Layer w11: v1(2127.98,1809) 2130.98,1809 2135.19,1813.21 U1.52@2307.78,1813.21 ; 2251.98,1691 2275.48,1714.5 U1.57@2303.98,1715 ; 2271.48,1616.5 U1.62@2304.48,1616.5 ; U1.62@2307.78,1616.36 v2@2389.34,1616.36 ; U1.57@2311.48,1714.5 v1(2391.48,1714.5) ; v1(2847.98,2091) 2847.98,2111 2880.48,2143.5 2880.48,2188 2880.62,2187.64 U1.11@2880.62,2189.2 ; U1.11@2880.48,2191 2880.48,2294 ; v1(3017.98,1427) 3018.41,1417.43 U1.105@3018.41,1338.8 3018.41,1272.57 3047.98,1243 C7.2@3047.98,1240.5 ; v1(3083.98,1743) 3092.51,1734.47 U1.125@3158.18,1734.47 3228.51,1734.47 C8.2@3231.98,1739
  Top Layer w12: C20.2@878.48,2511 v1(879.98,2471) ; BR1.3@1907.98,1484.23 JR1.1@1907.98,1493.5 ; R4.2@2104.98,1739 2104.98,1722 v1(2127.98,1699) ; C6.2@2201.48,1643 2201.48,1644.5 2251.98,1691 ; C4.2@2241.48,1543 2255.98,1547 2255.98,1601 2271.48,1616.5 ; C5.2@2859.98,2325.5 2880.48,2294
  Top Layer w16: v1(1527.98,2407) 1527.98,2375 ; RN1.6@1553.41,2342.75 1527.98,2342.75 1527.98,2375 ; RN1.5@1553.41,2374.24 1529.41,2375 1527.98,2375 ; BR1.3@1907.98,1484.23 1883.98,1460.23 1883.98,1415 1898.98,1396 T3.2@1906.98,1387 1898.98,1372 1923.98,1347 1991.98,1347 v2(2003.98,1335) ; L1.1@2014.26,1293.41 L1.1@2016.67,1291 ; v2(2191.98,1183) 2223.98,1219 ; ERASE.1@3743.98,2263 v1(3795.98,2263) ; RN5.1@4058.55,2151.76 4084.74,2151.76 ; RN5.2@4058.55,2183 RN5.2@4058.55,2183.25 ; RN5.2@4058.81,2183 4087.98,2183 4091.98,2179 4091.98,2159 4084.74,2151.76 ; IC4.4@4133.99,1995 4133.99,2108.99 4091.22,2151.76 4084.74,2151.76
  Top Layer w24: v2(2099.98,2347) 2119.98,2323 L2.1@2119.98,2299 ; v2(3819.98,1995) IC4.2@3889.98,1995
  Top Layer w32: v2(2003.98,1335) 2015.98,1319 2015.98,1291 L1.1@2016.67,1291 ; C1.+@2183.98,1115 2183.98,1139 2191.98,1147 v2(2191.98,1183) ; C29.+@3663.98,1999.94 3767.04,1999.94 v2(3771.98,1995) ; IC4.2@3889.98,1995 IC4.4@4133.99,1995
  Bottom Layer w32: v2(3771.98,1995) v2(3819.98,1995)
  other v2: 4131.98,1903 4203.98,1943 4063.98,1995 4203.98,2043 4131.98,2087
+5V: C30.2 C36.1 D2.C D3.A IC1.8 IC4.3 IC6.4 IC6.32 ICSP1.2 L4.P$2 PC2.+ POWER.5 R12.1 R13.2 R14.1 R15.1 SPI.2 T1.2 T2.2 XIO.1 XIO.2 | length 7847
  Top Layer w10: R15.1@887.98,1317.5 902.48,1317.5 911.98,1327 911.98,1331 933.48,1352.5 R14.1@939.98,1352.5 958.48,1352.5 v1(979.98,1331) ; 1390.39,1477.41 1399.98,1487 1399.98,1507 1409.82,1516.84 IC6.4@1427.52,1516.84 ; v1(1407.98,1615) 1407.52,1603.46 IC6.32@1455.08,1603.46 ; v1(1483.98,1751) 1486.83,1753.85 IC1.8@1486.83,1800.57
  Top Layer w12: v1(1483.98,1751) 1493.48,1741.5 C30.2@1526.98,1741.5
  Top Layer w16: v1(1323.98,1423) 1352.39,1451.41 C36.1@1351.98,1477.5 1390.39,1477.41 ; v1@1403.98,1611 v1(1407.98,1615) ; v1(1739.98,1723) 1741.57,1721.41 1741.57,1698.59 1733.98,1691 R13.2@1733.48,1683 D2.C@1802.91,1683 ; D2.C@1803.98,1683 D2.C@1802.91,1683 ; D2.C@1807.98,1677.93 D2.C@1802.91,1683
  Top Layer w20: v2(3831.98,1623) 3831.98,1655 3839.98,1663 L4.P$2@3909.87,1651
  Top Layer w24: T2.2@1244.98,1575 1275.98,1611 v1@1403.98,1611 ; PC2.+@3743.98,1533.49 3830.47,1533.49 v2(3831.98,1535) v2(3831.98,1579) v2(3831.98,1623) ; v1(3807.98,1251) R12.1@3808.98,1207 ; L4.P$2@3909.87,1651 3915.98,1656.89 D3.A@3915.98,1481.93
  Top Layer w32: T1.2@1410.98,1778 1428.98,1778 1443.98,1763 1471.98,1763 v1(1483.98,1751) ; POWER.5@2303.98,843 POWER.5@2307.98,839 ; v2(2543.98,1963) 2627.98,1963 2663.98,1999 2763.98,1999 2783.98,2019 2865.98,2019 2883.98,2035 2919.98,2035 2931.98,2047 2971.98,2047 2983.98,2035 3089.98,2035 3107.98,2053 3107.98,2121 3125.98,2139 3215.98,2139 v2(3263.98,2187) ; SPI.2@3412.98,1939 3711.98,1939 v2(3747.98,1903) 3804.98,1903 IC4.3@3889.98,1904 3880.98,1904 v2(3803.98,1903) ; v2(4023.98,2307) 4267.98,2307 4291.98,2331 v2(4371.98,2331) v2(4419.98,2331)
  Top Layer w40: v2(1957.98,951) 2241.98,951 2303.98,889 POWER.5@2303.98,843
  Bottom Layer w8: v2(3803.98,1903) 3907.98,2007 3907.98,2231 3943.98,2267 3943.98,2283 3963.98,2303 3963.98,2307
  Bottom Layer w16: v1(979.98,1331) 1059.98,1251 1211.98,1251 1283.98,1323 1283.98,1383 1323.98,1419 v1(1323.98,1423)
  Bottom Layer w24: POWER.5@2307.98,839 POWER.5@2309.98,835 ; v2(3803.98,1903) 3803.98,1835 3831.98,1803 v2(3831.98,1623) ; v1(3807.98,1251) 3831.98,1275 v2(3831.98,1535)
  Bottom Layer w32: POWER.5@2307.98,839 2309.98,873 ; POWER.5@2309.98,835 2309.98,873 ; v2(2543.98,1963) 2543.98,1601 2443.98,1501 2443.98,1019 2387.98,963 2387.98,943 2343.98,899 2319.98,899 2309.98,887 2309.98,873 ; v2@3271.98,2195 v2(3263.98,2187) 3383.98,2307 3963.98,2307 v2(4023.98,2307) ; v2(4371.98,2331) v2(4419.98,2331) 4419.98,2351 4423.98,2355 4423.98,2643 4499.98,2719 XIO.1@4507.98,2739
  Bottom Layer w40: XIO.1@4507.98,2739 XIO.2@4607.98,2739
  other v2: 3831.98,1667
AD0: ADCL.1 U1.78 | length 879.2
  Top Layer w8: U1.78@2486.92,1338.8 2487.98,1331 2487.98,1266.94 2503.92,1251 2619.98,1251 2647.98,1223 v1(2683.98,1223) ; v1(2675.98,843) 2807.98,843 ADCL.1@2807.98,839
  Bottom Layer w8: v1(2675.98,843) 2675.98,867 2703.98,895 2727.98,895 2755.98,923 2755.98,1011 2715.98,1051 2715.98,1103 2695.98,1123 2695.98,1211 v1(2683.98,1223)
AD1: ADCL.2 U1.79 | length 1056.3
  Top Layer w8: v1(2471.98,947) 2499.98,919 2519.98,919 2535.98,903 2619.98,903 2651.98,871 2751.98,871 2779.98,899 2899.98,899 2907.98,891 ADCL.2@2907.98,839 ; v1(2503.98,1395) 2503.98,1375 2507.98,1371 2507.98,1338.8 U1.79@2506.6,1338.8
  Bottom Layer w8: v1(2471.98,947) 2487.98,963 2487.98,1343 2503.98,1355 v1(2503.98,1395)
AD2: ADCL.3 U1.80 | length 1000.3
  Top Layer w8: v1(2515.98,947) 2543.98,919 2627.98,919 2659.98,887 2743.98,887 2771.98,915 2851.98,915 2867.98,931 2967.98,931 3007.98,891 ADCL.3@3007.98,839 ; v1(2515.98,1279) 2525.98,1287 U1.80@2526.29,1338.8
  Bottom Layer w8: v1(2515.98,947) v1(2515.98,1279)
AD3: ADCL.4 U1.81 | length 1161.4
  Top Layer w8: U1.81@2545.97,1338.8 2545.97,1393.01 v1(2545.98,1395) ; v1(2671.98,919) 2687.98,903 2735.98,903 2763.98,931 2843.98,931 2859.98,947 2975.98,947 3015.98,907 3091.98,907 3107.98,891 ADCL.4@3107.98,839
  Bottom Layer w8: v1(2545.98,1395) 2545.98,1337 2583.98,1299 2583.98,1267 2559.98,1243 2559.98,1067 2575.98,1051 2611.98,1051 2643.98,1019 2643.98,947 v1(2671.98,919)
AD4: ADCL.5 U1.82 | length 1275.2
  Top Layer w8: U1.82@2565.66,1338.8 2565.66,1372.68 2575.98,1383 v1(2575.98,1423) ; v1(2723.98,931) 2739.98,947 2835.98,947 2851.98,963 2983.98,963 3023.98,923 3099.98,923 3115.98,907 3191.98,907 3207.98,891 ADCL.5@3207.98,839 ADCL.5@3207.98,835
  Bottom Layer w8: v1(2575.98,1423) 2575.98,1339 2599.98,1315 2599.98,1255 2575.98,1231 2575.98,1087 2595.98,1067 2619.98,1067 2659.98,1027 2659.98,967 2679.98,947 2707.98,947 v1(2723.98,931)
AD5: ADCL.6 U1.83 | length 1236.7
  Top Layer w8: v1(2555.98,947) 2699.98,947 2715.98,963 2827.98,963 2843.98,979 2991.98,979 3031.98,939 3107.98,939 3123.98,923 3199.98,923 3251.98,871 3275.98,871 ADCL.6@3307.98,839 ; v1(2555.98,1279) 2583.98,1307 2583.98,1331 U1.83@2585.34,1338.8
  Bottom Layer w8: v1(2555.98,947) 2555.98,1043 2543.98,1055 2543.98,1267 v1(2555.98,1279)
AD6: ADCL.7 U1.84 | length 1304.5
  Top Layer w8: v1(2604.98,1395) 2605.03,1392.05 U1.84@2605.03,1338.8 ; v1(2687.98,979) 2819.98,979 2835.98,995 2999.98,995 3039.98,955 3115.98,955 3131.98,939 3207.98,939 3247.98,899 3323.98,899 3383.98,839 ADCL.7@3407.98,839
  Bottom Layer w8: v1(2604.98,1395) 2604.98,1342 2615.98,1331 2615.98,1255 2635.98,1235 2635.98,1207 2663.98,1179 2663.98,1107 2683.98,1087 2683.98,1039 2675.98,1031 2675.98,991 v1(2687.98,979)
AD7: ADCL.8 U1.85 | length 1254.2
  Top Layer w8: U1.85@2624.71,1338.8 2623.98,1331 2623.98,1290.89 2641.87,1273 v1(2643.98,1271) ; v1(2719.98,1007) 2731.98,995 2811.98,995 2827.98,1011 3007.98,1011 3047.98,971 3123.98,971 3139.98,955 3215.98,955 3231.98,939 3307.98,939 3347.98,899 3467.98,899 3507.98,859 ADCL.8@3507.98,839
  Bottom Layer w8: v1(2643.98,1271) 2655.98,1259 2655.98,1211 2679.98,1187 2679.98,1115 2699.98,1095 2699.98,1027 v1(2719.98,1007)
AD8: ADCH.1 U1.88 | length 1475.7
  Top Layer w8: U1.88@2683.77,1338.8 2683.77,1390.79 v1(2683.98,1395) ; v1(2783.98,1047) 2787.98,1043 3023.98,1043 3063.98,1003 3139.98,1003 3155.98,987 3215.98,987 3239.98,1011 3259.98,1011 3355.98,915 3631.98,915 ADCH.1@3707.98,839
  Bottom Layer w8: v1(2683.98,1395) 2683.98,1307 2715.98,1275 2715.98,1255 2727.98,1243 2727.98,1139 2783.98,1083 v1(2783.98,1047)
AD9: ADCH.2 U1.89 | length 1591.2
  Top Layer w8: v1@2683.29,1263 v1@2687.29,1266.31 ; v1(2683.98,1263) v1@2687.29,1266.31 ; U1.89@2703.45,1338.8 2703.98,1331 2703.98,1284.31 2703.29,1282.31 v1@2687.29,1266.31 ; v1(2743.98,1063) 2755.98,1075 2795.98,1075 2811.98,1059 3031.98,1059 3071.98,1019 3223.98,1019 3351.98,1151 3455.98,1151 3679.98,927 3719.98,927 ADCH.2@3807.98,839
  Bottom Layer w8: v1(2683.98,1263) 2711.98,1235 2711.98,1131 2743.98,1099 v1(2743.98,1063)
AD10: ADCH.3 U1.90 | length 1558.5
  Top Layer w8: U1.90@2723.14,1338.8 2723.33,1339 2723.98,1339 2723.98,1303 2751.98,1275 v1(2759.98,1275) ; v1(3227.98,1075) 3323.98,1167 3463.98,1167 3687.98,943 3803.98,943 ADCH.3@3907.98,839
  Bottom Layer w8: v1(2759.98,1275) 2759.98,1155 2799.98,1115 2883.98,1115 2887.98,1111 3191.98,1111 v1(3227.98,1075)
AD11(TXD3): ADCH.4 U1.91 | length 1903.4
  Top Layer w8: v1(2715.98,1423) 2741.98,1397 2741.98,1341 U1.91@2742.82,1338.8 ; v1(3087.98,1047) 3159.98,1047 3295.98,1183 3471.98,1183 3695.98,959 3811.98,959 3871.98,899 3947.98,899 ADCH.4@4007.98,839
  Bottom Layer w8: v1(2715.98,1423) 2715.98,1311 2731.98,1295 2731.98,1263 2743.98,1251 2743.98,1147 2791.98,1099 2875.98,1099 2883.98,1091 3071.98,1091 3087.98,1075 v1(3087.98,1047)
AD14(RXD3): U1.92 XIO.33 | length 2463.3
  Top Layer w8: v1(2715.98,1463) 2762.51,1416.53 U1.92@2762.51,1338.8 ; v1(2811.98,1143) 2847.98,1107 3147.98,1107 3271.98,1231 3495.98,1231 3719.98,1007 3851.98,1007 3911.98,947 4187.98,947 4379.98,1139 XIO.33@4507.98,1139
  Bottom Layer w8: v1(2715.98,1463) 2761.98,1417 2761.98,1349 2787.98,1323 2787.98,1165 v1(2811.98,1143)
AREF: BR1.1 PWMH.8 | length 1735.1
  Top Layer w12: v1(1875.98,1667) 1907.98,1635 BR1.1@1907.98,1586.59
  Bottom Layer w10: PWMH.8@1747.98,2739 1747.98,2423 1807.98,2363 1807.98,2055 1699.98,1947 1647.98,1947 1619.98,1975 1519.98,1975 1503.98,1959 1503.98,1835 1527.98,1811 1635.98,1811 1691.98,1755 1787.98,1755 v1(1875.98,1667)
AVREF: C19.2 L3.2 U1.75 | length 454.3
  Top Layer w8: C19.2@2415.98,1240.5 2423.98,1243 C19.2@2427.86,1246.88
  Top Layer w11: C19.2@2427.86,1246.88 U1.75@2427.86,1338.8
  Top Layer w12: L3.2@2103.29,1215 2131.98,1215 2187.98,1271 2299.98,1271 2330.48,1240.5 C19.2@2415.98,1240.5
BD+: J3.P3 R20.2 Z4.2 | length 463.8
  Top Layer w10: J3.P3@968.98,1614 969.98,1615 1019.98,1615 1039.98,1595 Z4.2@1039.98,1594.37 1043.98,1606.37 1079.98,1607 1195.98,1723 1255.98,1723 1263.98,1731 1354.39,1731 R20.2@1362.48,1727
BD-: J3.P2 R19.2 Z3.2 | length 492.3
  Top Layer w10: J3.P2@968.98,1640 1036.35,1640 Z3.2@1067.98,1671.63 1064.61,1683.63 1065.24,1683 1091.98,1683 1167.98,1759 1215.98,1759 v1(1223.98,1767) ; v1(1315.98,1687) 1335.98,1687 1339.98,1683 R19.2@1362.48,1683
  Bottom Layer w10: v1(1223.98,1767) 1303.98,1687 v1(1315.98,1687)
BOOST: C42.1 D3.C IC2.1 | length 165.1
  Top Layer w16: D3.C@3915.98,1348.07 3937.05,1360.07 3947.98,1371 C42.1@4004.98,1371 3994.7,1364.72 IC2.1@3994.7,1308.4
CANRX0: ADCH.7 U1.24 | length 2994.5
  Top Layer w8: v1(2607.98,2123) 2623.98,2139 2623.98,2187 U1.24@2624.71,2189.2 ; v1(2667.98,1943) 2695.98,1971 2775.98,1971 2795.98,1991 2879.98,1991 2895.98,2007 v1(2951.98,2007) ; v1(3147.98,1315) 3175.98,1315 3283.98,1423 3519.98,1423 3791.98,1151 4147.98,1151 v1(4171.98,1175)
  Bottom Layer w8: v1(2607.98,2123) 2607.98,2003 v1(2667.98,1943) ; v1(2951.98,2007) 2951.98,1935 2931.98,1915 2931.98,1751 2939.98,1743 2939.98,1619 3059.98,1499 3059.98,1459 3111.98,1407 3111.98,1351 v1(3147.98,1315) ; v1(4171.98,1175) 4227.98,1175 4307.98,1095 ADCH.7@4307.98,839
CANTX0: ADCH.8 U1.23 | length 3018.8
  Top Layer w8: U1.23@2644.4,2189.2 2643.98,2189.2 2643.98,2131 v1(2651.98,2123) ; v1(2711.98,1943) 2771.98,1943 2803.98,1975 2887.98,1975 2903.98,1991 2927.98,1991 2939.98,1979 2979.98,1979 v1(2991.98,1991) ; v1(3147.98,1355) 3171.98,1379 3211.98,1379 3271.98,1439 3527.98,1439 3799.98,1167 4119.98,1167 4163.98,1211 v1(4203.98,1211)
  Bottom Layer w8: v1(2651.98,2123) 2651.98,2003 v1(2711.98,1943) ; v1(2991.98,1991) 2991.98,1951 2947.98,1907 2947.98,1759 2955.98,1751 2955.98,1627 3075.98,1507 3075.98,1467 3127.98,1415 3127.98,1371 v1(3147.98,1355) ; v1(4203.98,1211) 4235.98,1211 4335.98,1107 4335.98,987 4407.98,915 ADCH.8@4407.98,839
CANTX1/IO: U1.140 XIO.34 | length 3105.3
  Top Layer w8: U1.140@3158.18,2029.75 3190.73,2029.75 v1(3259.98,2099) ; v1(3235.98,2407) 3255.98,2407 3307.98,2355 3391.98,2355 3399.98,2347 3783.98,2347 3807.98,2371 3951.98,2371 3967.98,2387 4047.98,2387 4067.98,2407 4111.98,2407 4147.98,2371 v1(4227.98,2371) ; v1(4399.98,1091) 4559.98,1091 XIO.34@4607.98,1139
  Bottom Layer w8: v1(3235.98,2407) 3235.98,2343 3255.98,2323 3255.98,2235 3231.98,2211 3231.98,2147 3259.98,2119 v1(3259.98,2099) ; v1(4227.98,2371) 4227.98,2131 4323.98,2035 4323.98,1547 4359.98,1515 4399.98,1475 v1(4399.98,1091)